# EAGLE board board 2 (EAGLE 5.06)
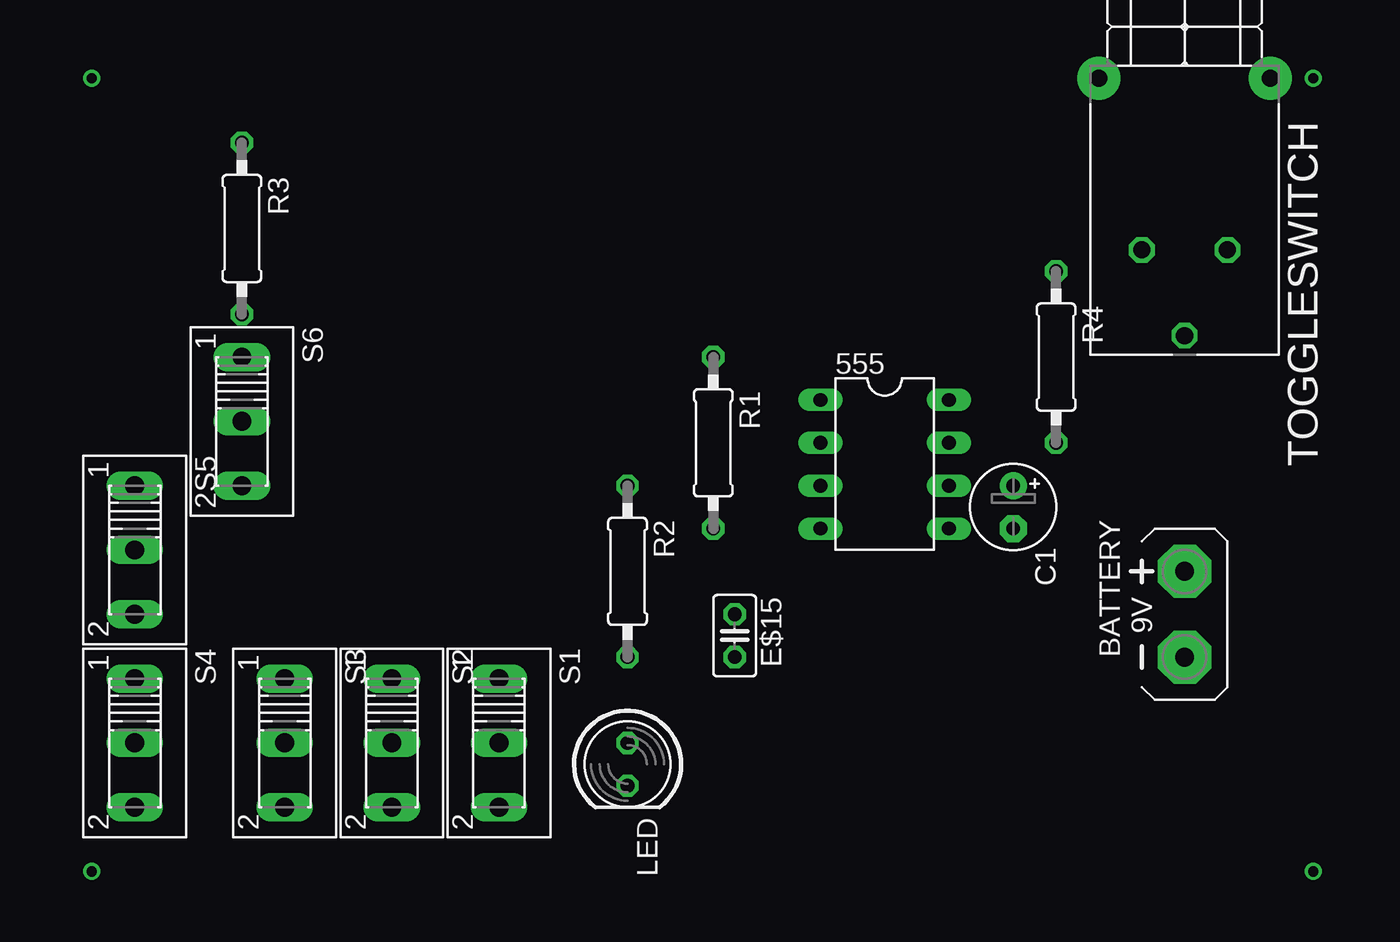
[diagram p0: board, top side]
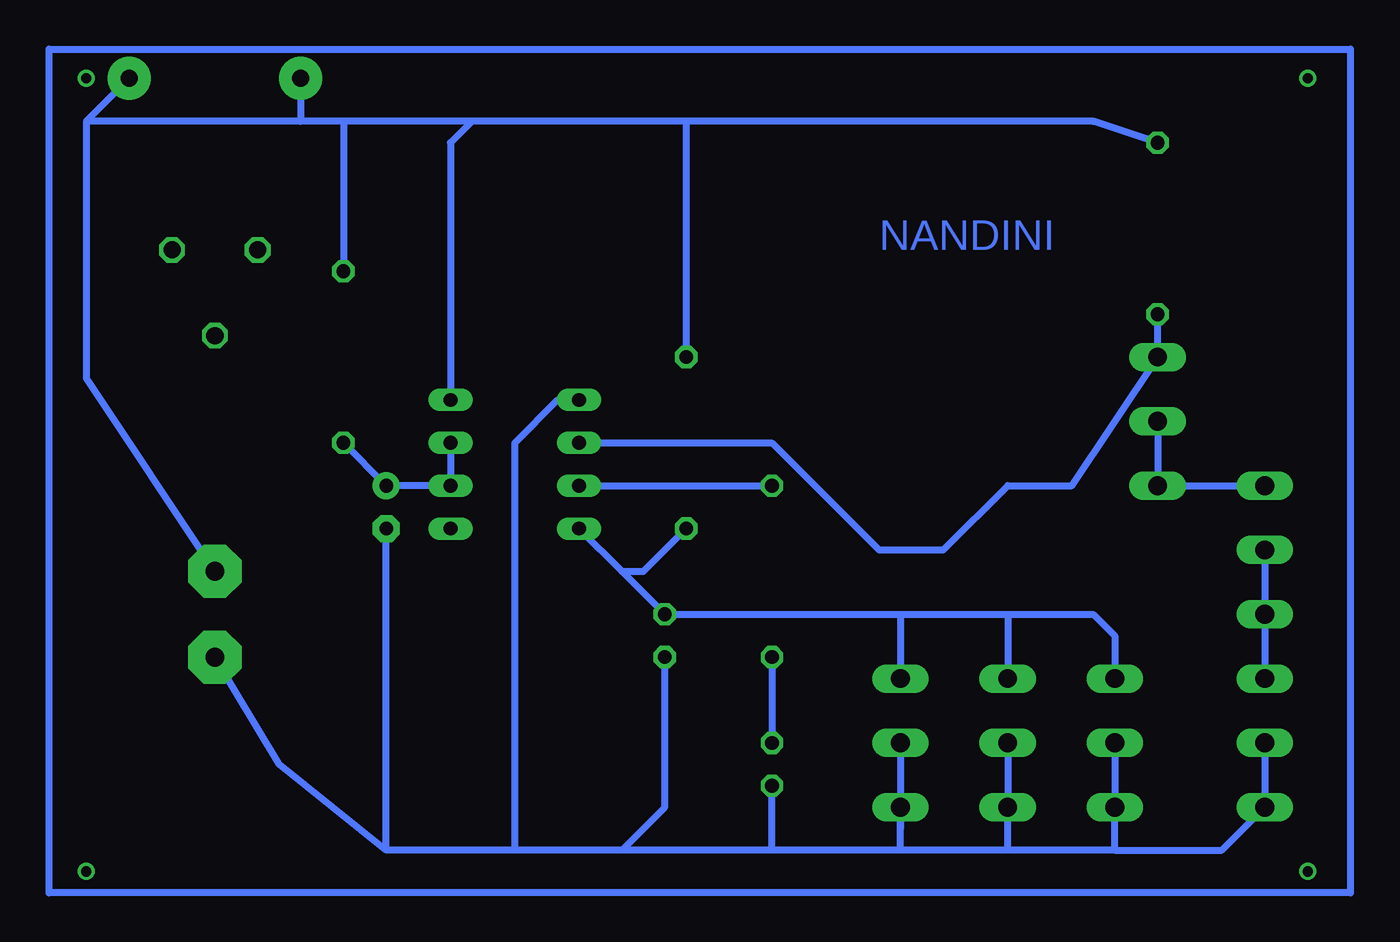
[diagram p1: board, bottom side, seen from below]

No outline drawn. Coordinates in mm, seen from the top.
Copper layers (1*16): Top 0.035mm / dielectric 1.5mm / Bottom 0.035mm
Design rules "default": minimum track width 10mil, minimum drill 24mil, track to track 8mil, track to pad 8mil, pad to pad 8mil, via to via 8mil, smd to smd 8mil, copper to edge 40mil, drill to drill 8mil, minimum pad ring 10mil, minimum via ring 8mil, stop-mask expansion 4mil, vias tented up to drill 0mil, thermal gap 10mil

## Footprints (pad centres in the part's own frame; a part is rotated, then mirrored left to right if it is on the bottom)
DIL08 = drill 0.813 long: 1 -3.81,-3.81; 2 -1.27,-3.81; 3 1.27,-3.81; 4 3.81,-3.81; 5 3.81,3.81; 6 1.27,3.81; 7 -1.27,3.81; 8 -3.81,3.81
AB9V = drill 1.118 pad 3.15 octagon: + 0,2.54; - 0,-2.54
E2,5-5 = drill 0.813 pad 1.6 round: + -1.27,0 | drill 0.813 pad 1.6 octagon: - 1.27,0
C025-025X050 = drill 0.813 octagon: 1 -1.27,0; 2 1.27,0
LED5MM = drill 0.813 octagon: A -1.27,0; K 1.27,0
0207/10 = drill 0.813 octagon: 1 -5.08,0; 2 5.08,0
255SB = drill 1.118 long: 1 -3.81,0; 2 0,0; 3 3.81,0
316-917 = drill 1.016 octagon: 1 10.16,2.54; 2 15.24,0; 3 10.16,-2.54 | drill 1.016 pad 2.54 round: B 0,-5.08; B1 0,5.08

## Placement (x,y rotation side)
555  [DIL08]  49.53,25.4 270 top
BATTERY  [AB9V]  67.31,16.51 0 top
C1  [E2,5-5]  57.15,22.86 270 top
E$15  [C025-025X050]  40.64,15.24 270 top
LED  [LED5MM]  34.29,7.62 270 top
R1  [0207/10]  39.37,26.67 270 top
R2  [0207/10]  34.29,19.05 270 top
R3  [0207/10]  11.43,39.37 270 top
R4  [0207/10]  59.69,31.75 270 top
S1  [255SB]  26.67,8.89 270 top
S2  [255SB]  20.32,8.89 270 top
S3  [255SB]  13.97,8.89 270 top
S4  [255SB]  5.08,8.89 270 top
S5  [255SB]  5.08,20.32 270 top
S6  [255SB]  11.43,27.94 270 top
TOGGLESWITCH  [316-917]  67.31,48.26 270 top

## Library data of the parts
555 = ic-package
BATTERY = battery
C1 E$15 R1-R4 = resistor
LED = led
S1-S6 TOGGLESWITCH = switch

## Nets
S$2: 555.8 BATTERY.+ R1.1 R3.1 R4.1 TOGGLESWITCH.B TOGGLESWITCH.B1
S$3: S5.1 S6.2 S6.3
S$4: S4.1 S5.2 S5.3
S$7: 555.4 E$15.1 R1.2 S1.1 S2.1 S3.1
S$8: 555.3 R2.1
S$9: LED.A R2.2
S$10: 555.2 R3.2 S6.1
S$11: 555.1 BATTERY.- C1.- E$15.2 LED.K S1.2 S1.3 S2.2 S2.3 S3.2 S3.3 S4.2 S4.3
S$12: 555.6 555.7 C1.+ R4.2

## Tracks (layer width: path | path; a pad name or v marks a point on that pad's centre or on a via)
S$1
  Bottom 0.406: 0,0 77.14,0 77.14,50 0,50 0,0
S$2
  Bottom 0.406: BATTERY.+ 74.93,30.48 74.93,45.72 | 74.93,45.72 TOGGLESWITCH.B1 | 555.8 53.34,44.45 52.07,45.72 | 59.69,45.72 62.23,45.72 | 62.23,45.72 74.93,45.72 | 59.69,45.72 R4.1 | 52.07,45.72 59.69,45.72 | 39.37,45.72 52.07,45.72 | 39.37,45.72 R1.1 | 39.37,45.72 15.24,45.72 R3.1 | TOGGLESWITCH.B 62.23,45.72
S$3
  Bottom 0.406: S5.1 S6.3 S6.2
S$4
  Bottom 0.406: S4.1 S5.3 S5.2
S$5  (via drill 0.6)
  other vias: 2.54,48.26
S$6  (via drill 0.6)
  other vias: 74.93,48.26
S$7
  Bottom 0.406: 555.4 43.18,19.05 | 43.18,19.05 E$15.1 26.67,16.51 | 26.67,16.51 20.32,16.51 | 20.32,16.51 15.24,16.51 13.97,15.24 S3.1 | 20.32,16.51 S2.1 | 26.67,16.51 S1.1 | 43.18,19.05 41.91,19.05 R1.2
S$8
  Bottom 0.406: 555.3 R2.1
S$9
  Bottom 0.406: R2.2 LED.A
S$10
  Bottom 0.406: 555.2 34.29,26.67 27.94,20.32 24.13,20.32 20.32,24.13 16.51,24.13 S6.1 R3.2
S$11
  Bottom 0.406: 555.1 46.99,29.21 49.53,26.67 49.53,2.54 | 57.15,2.54 63.5,7.62 BATTERY.- | 57.15,2.54 C1.- | E$15.2 40.64,5.08 43.18,2.54 | 49.53,2.54 57.15,2.54 | 43.18,2.54 49.53,2.54 | 34.29,2.54 43.18,2.54 | 34.29,2.54 LED.K | 26.67,2.54 34.29,2.54 | 26.67,2.54 26.67,3.81 | 26.67,3.81 S1.3 | 20.32,2.54 26.67,2.54 | 20.32,2.54 S2.3 S2.2 | 13.97,2.54 20.32,2.54 | 13.97,2.54 S3.3 S3.2 | 13.97,2.54 7.62,2.54 S4.3 S4.2 | S1.2 26.67,3.81
S$12
  Bottom 0.406: 555.7 555.6 C1.+ R4.2
S$13  (via drill 0.6)
  other vias: 2.54,1.27
S$14  (via drill 0.6)
  other vias: 74.93,1.27

## Text on the board
Bottom: NANDINI